# EAGLE board DXM-OOBD - V1 (EAGLE 5.11)
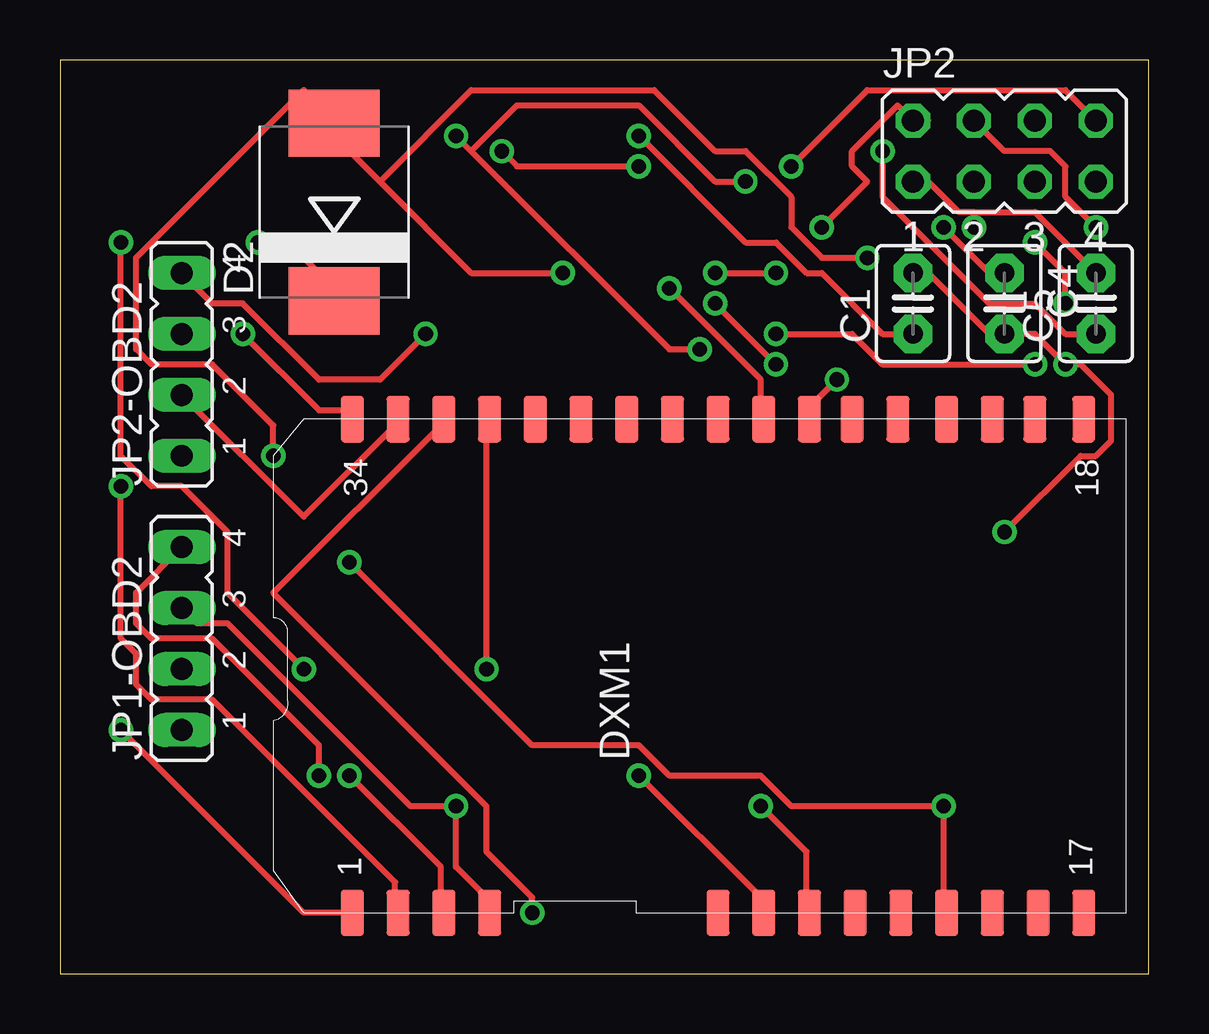
[diagram p0: board, top side]
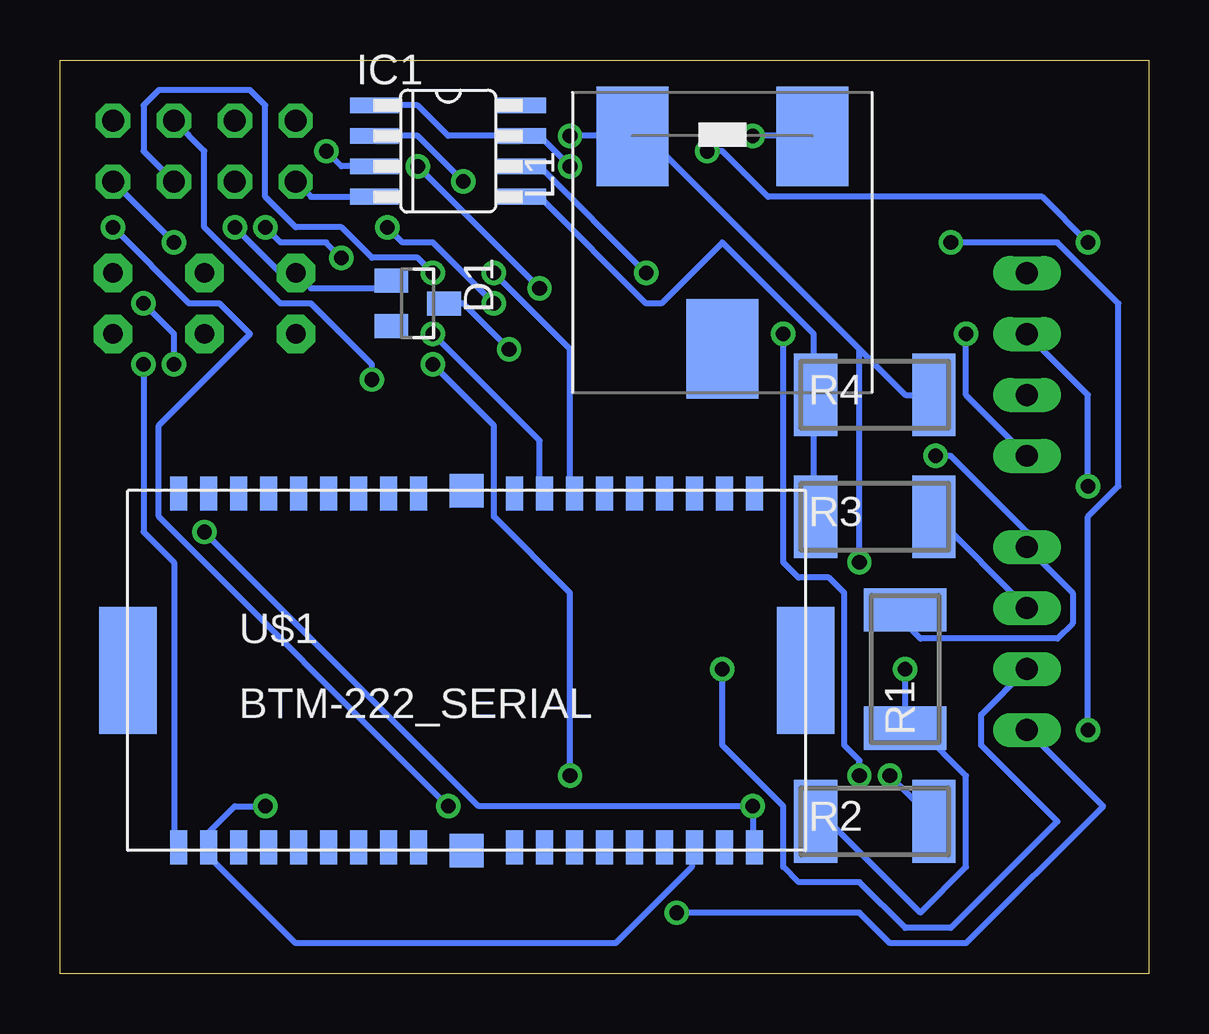
[diagram p1: board, bottom side, seen from below]

Size 45.39 x 38.09 mm. Coordinates in mm from the lower left corner, seen from the top.
Outline: 0,0 45.39,0 45.39,38.09 0,38.09 0,0
Copper layers (1*16): Top 0.035mm / dielectric 1.5mm / Bottom 0.035mm
Design rules "default": minimum track width 10mil, minimum drill 24mil, track to track 8mil, track to pad 8mil, pad to pad 8mil, via to via 8mil, smd to smd 8mil, copper to edge 40mil, drill to drill 8mil, minimum pad ring 10mil, minimum via ring 8mil, stop-mask expansion 4mil, vias tented up to drill 0mil, thermal gap 10mil

## Footprints (pad centres in the part's own frame; a part is rotated, then mirrored left to right if it is on the bottom)
C2.5-3 = drill 0.813 pad 1.6 octagon: 1 -1.27,0; 2 1.27,0
SOT23 = smd 1 x 1.4: 1 -0.95,-1.1; 2 0.95,-1.1; 3 0,1.1
SMC = smd 2.8 x 3.8: A 3.7,0; C -3.7,0
DMX1-MINI = smd 1.93 x 0.965: 1 0,32.258; 2 0,30.353; 3 0,28.448; 4 0,26.543; 9 0,17.018; 10 0,15.113; 11 0,13.208; 12 0,11.303; 13 0,9.398; 14 0,7.493; 15 0,5.588; 16 0,3.683; 17 0,1.778; 18 20.574,1.778; 19 20.574,3.81; 20 20.574,5.588; 21 20.574,7.493; 22 20.574,9.525; 23 20.574,11.43; 24 20.574,13.208; 25 20.574,15.113; 26 20.574,17.018; 27 20.574,18.923; 28 20.574,20.828; 29 20.574,22.733; 30 20.574,24.638; 31 20.574,26.543; 32 20.574,28.448; 33 20.574,30.353; 34 20.574,32.258
SO8 = smd 0.66 x 2.032: 1 -1.905,-3.073; 2 -0.635,-3.073; 3 0.635,-3.073; 4 1.905,-3.073; 5 1.905,3.073; 6 0.635,3.073; 7 -0.635,3.073; 8 -1.905,3.073
JP4 = drill 0.914 long: 1 -3.81,0; 2 -1.27,0; 3 1.27,0; 4 3.81,0
JP4Q = drill 0.914 octagon: 1 -3.81,-1.27; 2 -3.81,1.27; 3 -1.27,-1.27; 4 -1.27,1.27; 5 1.27,-1.27; 6 1.27,1.27; 7 3.81,-1.27; 8 3.81,1.27
WE-HCF_74436/38/39... = smd 4.15 x 3: 1 -4.425,3.75; 2 -4.425,-3.75; 3 4.425,0
SMS-0 = smd 1.8 x 3.45: 1 2.464,0; 2 -2.464,0
BTM-222 = smd 2.4 x 5.3: $AGND -14.625,3.75; $BGND 13.625,3.75 | smd 0.711 x 1.422: P$1 -12.5,-3.625; P$2 -11.25,-3.625; P$3 -10,-3.625; P$4 -8.75,-3.625; P$5 -7.5,-3.625; P$6 -6.25,-3.625; P$7 -5,-3.625; P$8 -3.75,-3.625; P$9 -2.5,-3.625; P$11 1.5,-3.625; P$12 2.75,-3.625; P$13 4,-3.625; P$14 5.25,-3.625; P$15 6.5,-3.625; P$16 7.75,-3.625; P$17 9,-3.625; P$18 10.25,-3.625; P$19 11.5,-3.625; P$20 11.5,11.125; P$21 10.25,11.125; P$22 9,11.125; P$23 7.75,11.125; P$24 6.5,11.125; P$25 5.25,11.125; P$26 4,11.125; P$27 2.75,11.125; P$28 1.5,11.125; P$30 -2.5,11.125; P$31 -3.75,11.125; P$32 -5,11.125; P$33 -6.25,11.125; P$34 -7.5,11.125; P$35 -8.75,11.125; P$36 -10,11.125; P$37 -11.25,11.125; P$38 -12.5,11.125 | smd 1.422 x 1.4: P$10 -0.5,-3.75; P$29 -0.5,11.25

## Placement (x,y rotation side)
C1  1µF  [C2.5-3]  35.56,27.94 90 top
C4  [C2.5-3]  39.37,27.94 270 top
C5  [C2.5-3]  43.18,27.94 90 top
D1  BAS40  [SOT23]  30.48,27.94 270 bottom
D2  [SMC]  11.43,31.75 90 top
DXM1  [DMX1-MINI]  44.45,2.54 90 top
IC1  MC34063-SO  [SO8]  29.21,34.29 270 bottom
JP1-OBD2  [JP4]  5.08,13.97 90 top
JP2  [JP4Q]  39.37,34.29 0 top
JP2-OBD2  [JP4]  5.08,25.4 90 top
L1  [WE-HCF_74436/38/39...]  17.78,30.48 270 bottom
R1  [SMS-0]  10.16,12.7 90 bottom
R2  [SMS-0]  11.43,6.35 0 bottom
R3  [SMS-0]  11.43,19.05 0 bottom
R4  [SMS-0]  11.43,24.13 0 bottom
U$1  BTM-222_SERIAL  [BTM-222]  27.94,8.89 0 bottom

## Library data of the parts
C1 C4 C5 = capacitor-wima
D1 D2 = diode
DXM1 = DXM
IC1 = mc34063
JP1-OBD2 JP2 JP2-OBD2 = jumper
L1 = wuerth-elektronik
R1-R4 = resistor-shunt; OC_FARNELL: unknown; OC_NEWARK: unknown
U$1 = BTM_222

## Nets
3V3OUT: DXM1.9
+3V3: C1.1 DXM1.14 L1.2 R4.1 U$1.P$2 U$1.P$17
+12V: C4.1 D2.A IC1.6 JP1-OBD2.4 R1.1 R2.1
ANTENNE: U$1.P$37
CAN-H: DXM1.32 JP1-OBD2.1
CAN-L: DXM1.31 JP1-OBD2.2
GND: C1.2 C4.2 C5.2 D1.1 DXM1.4 IC1.4 JP1-OBD2.3 JP2.1 R3.1 U$1.P$1 U$1.P$19
K-LINE: DXM1.33 JP2-OBD2.2
L-LINE: DXM1.34 JP2-OBD2.1
MODE1: DXM1.29
MODE2: DXM1.28
N$1: IC1.5 R3.2 R4.2
N$2: C5.1 IC1.3
N$3: D1.3 IC1.2 L1.1
N$4: D2.C DXM1.1
N$5: IC1.1 IC1.7 R1.2 R2.2
N$6: U$1.P$29
N$7: U$1.P$38
N$8: U$1.P$18
N$9: U$1.P$10
N$10: DXM1.25 JP2.8
N$12: DXM1.24 JP2.6
N$13: JP2.5 U$1.P$26
N$14: JP2.7 U$1.P$27
N$16: DXM1.10 JP2.2
N$17: DXM1.11 JP2.4
PWM+: DXM1.2 JP2-OBD2.3
PWM-: DXM1.3 JP2-OBD2.4

## Tracks (layer width: path | path; a pad name or v marks a point on that pad's centre or on a via)
+3V3  (via drill 0.61)
  Top 0.254: DXM1.14 36.83,2.54 v36.83,6.99 30.48,6.99 29.21,8.26 25.4,8.26 24.13,9.53 19.69,9.53 v12.07,17.15 | C1.1 34.29,26.67 31.75,29.21 31.12,29.21 29.84,30.48 28.58,30.48 v24.13,34.92
  Bottom 0.254: U$1.P$17 19.05,5.08 19.05,4.45 22.23,1.27 35.56,1.27 39.37,5.08 U$1.P$2 39.37,5.72 38.1,6.99 v36.83,6.99 | v24.13,34.92 21.59,34.92 L1.2 20.95,34.92 12.07,26.03 | 12.07,26.03 10.16,24.13 R4.1 | v12.07,17.15 12.07,26.03
+12V  (via drill 0.61)
  Top 0.254: v10.79,8.26 10.79,9.53 6.35,13.97 3.81,13.97 3.17,14.61 3.17,15.88 JP1-OBD2.4 | v20.95,29.21 17.14,29.21 13.34,33.02 | 13.34,33.02 11.43,34.92 D2.A 11.43,35.56 10.16,36.83 3.17,29.84 3.17,26.03 3.81,25.4 6.35,25.4 8.89,22.86 v8.89,21.59 | C4.1 38.73,29.21 v36.83,31.12 | v33.66,29.84 31.75,29.84 30.48,31.12 30.48,32.39 28.58,34.29 27.3,34.29 24.77,36.83 17.14,36.83 13.34,33.02
  Bottom 0.254: R1.1 10.16,14.61 9.53,13.97 3.81,13.97 3.17,14.61 3.17,15.88 JP1-OBD2.4 5.08,18.42 8.25,21.59 v8.89,21.59 | v10.79,8.26 9.53,6.99 9.53,6.35 R2.1 | v20.95,29.21 25.4,33.66 IC1.6 | v36.83,31.12 36.2,30.48 34.29,30.48 v33.66,29.84
CAN-H  (via drill 0.61)
  Top 0.254: v19.69,2.54 19.69,3.18 17.78,5.08 17.78,6.99 8.89,15.88 15.88,22.86 DXM1.32
  Bottom 0.254: v19.69,2.54 12.07,2.54 10.79,1.27 7.62,1.27 1.91,6.99 JP1-OBD2.1
CAN-L  (via drill 0.61)
  Top 0.254: v17.78,12.7 17.78,22.86 DXM1.31
  Bottom 0.254: v17.78,12.7 17.78,9.53 15.24,6.99 15.24,4.45 14.61,3.81 12.07,3.81 10.16,1.91 8.25,1.91 3.81,6.35 6.99,9.53 6.99,10.8 JP1-OBD2.2
GND  (via drill 0.61)
  Top 0.254: DXM1.4 17.78,2.54 17.78,3.18 16.51,4.45 v16.51,6.99 14.61,6.99 6.99,14.61 5.71,14.61 JP1-OBD2.3 | C5.2 40.64,31.75 38.1,31.75 | 38.1,31.75 37.46,31.75 36.2,33.02 JP2.1 | C1.2 36.2,29.21 38.73,26.67 C4.2 40.64,26.67 v41.91,25.4 42.55,25.4 43.81,24.13 43.81,22.23 43.18,21.59 42.55,21.59 v39.37,18.42 | v38.1,31.12 38.1,31.75
  Bottom 0.254: 31.12,28.58 D1.1 31.75,28.58 34.92,28.58 C1.2 36.2,29.21 v38.1,31.12 | U$1.P$19 16.51,5.72 v16.51,6.99 27.94,6.99 v39.37,18.42 | JP1-OBD2.3 8.89,19.05 R3.1 | JP2.1 34.92,32.39 IC1.4 | v41.91,25.4 41.91,18.42 40.64,17.15 40.64,5.72 U$1.P$1
K-LINE
  Top 0.254: JP2-OBD2.2 10.16,19.05 13.97,22.86 DXM1.33
L-LINE  (via drill 0.61)
  Top 0.254: v7.62,26.67 10.79,23.5 12.07,23.5 DXM1.34
  Bottom 0.254: v7.62,26.67 7.62,24.13 JP2-OBD2.1
N$1
  Bottom 0.254: 13.97,24.13 13.97,26.67 17.78,30.48 20.32,27.94 20.95,27.94 25.4,32.39 IC1.5 | 13.97,24.13 13.97,19.05 R3.2 | 13.97,24.13 R4.2
N$2  (via drill 0.61)
  Top 0.254: v34.29,34.29 34.29,32.39 38.73,27.94 40.64,27.94 41.91,26.67 C5.1
  Bottom 0.254: v34.29,34.29 33.66,33.66 IC1.3
N$3  (via drill 0.61)
  Top 0.254: v26.67,26.03 25.4,26.03 17.14,34.29 | v16.51,34.92 17.14,34.29 | v28.58,33.02 27.3,33.02 24.13,36.2 19.05,36.2 17.14,34.29
  Bottom 0.254: v26.67,26.03 28.58,27.94 D1.3 | v16.51,34.92 14.61,34.92 L1.1 | v28.58,33.02 30.48,34.92 IC1.2
N$4  (via drill 0.61)
  Top 0.254: v2.54,10.16 10.16,2.54 DXM1.1 | v8.25,30.48 9.53,30.48 11.43,28.58 D2.C
  Bottom 0.254: v2.54,10.16 2.54,19.05 1.27,20.32 1.27,27.94 3.81,30.48 v8.25,30.48
N$5  (via drill 0.61)
  Top 0.254: v24.13,33.66 19.05,33.66 v18.41,34.29 | v2.54,30.48 2.54,21.59 3.81,20.32 5.08,20.32 6.99,18.42 6.99,15.88 v10.16,12.7
  Bottom 0.254: IC1.1 30.48,36.2 29.21,34.92 IC1.7 25.4,34.92 v24.13,33.66 | R2.2 13.34,6.35 9.53,2.54 7.62,4.45 7.62,8.26 9.53,10.16 10.16,10.16 R1.2 v10.16,12.7 | v18.41,34.29 17.78,34.29 15.88,32.39 4.45,32.39 v2.54,30.48
N$10  (via drill 0.61)
  Top 0.254: v25.4,28.58 29.21,24.77 29.21,23.5 DXM1.25 | v30.48,33.66 33.66,36.83 41.91,36.83 JP2.8
  Bottom 0.254: v25.4,28.58 v30.48,33.66
N$12  (via drill 0.61)
  Top 0.254: v32.38,24.77 31.12,23.5 DXM1.24
  Bottom 0.254: v32.38,24.77 32.38,25.4 34.92,27.94 36.2,27.94 39.37,31.12 39.37,34.29 JP2.6
N$13  (via drill 0.61)
  Top 0.254: v27.3,29.21 v29.84,29.21
  Bottom 0.254: v27.3,29.21 24.13,26.03 24.13,20.32 U$1.P$26 | v29.84,29.21 30.48,29.84 32.38,29.84 33.66,31.12 35.56,31.12 36.83,32.39 36.83,36.2 37.46,36.83 41.27,36.83 41.91,36.2 41.91,34.29 JP2.5
N$14  (via drill 0.61)
  Top 0.254: v29.84,26.67 33.02,26.67 34.29,25.4 v40.64,25.4 | v41.91,27.94 41.91,29.21 v40.64,30.48
  Bottom 0.254: v29.84,26.67 25.4,22.23 25.4,20.32 U$1.P$27 | v40.64,25.4 40.64,26.67 v41.91,27.94 | v40.64,30.48 JP2.7
N$16  (via drill 0.61)
  Top 0.254: 36.2,35.56 JP2.2 34.92,36.2 33.02,34.29 33.02,33.66 33.66,33.02 v31.75,31.12 | v24.13,8.26 29.21,3.18 29.21,2.54 DXM1.10 | v29.84,25.4 v27.3,27.94
  Bottom 0.254: v24.13,8.26 24.13,15.88 27.3,19.05 27.3,22.86 v29.84,25.4 | v27.3,27.94 29.84,30.48 31.12,30.48 v31.75,31.12
N$17  (via drill 0.61)
  Top 0.254: v29.21,6.99 31.12,5.08 31.12,2.54 DXM1.11 | v43.18,31.12 41.91,32.39 41.91,33.66 41.27,34.29 39.37,34.29 JP2.4
  Bottom 0.254: v29.21,6.99 41.27,19.05 41.27,22.86 37.46,26.67 38.73,27.94 40,27.94 v43.18,31.12
PWM+  (via drill 0.61)
  Top 0.254: v2.54,20.32 2.54,13.97 3.17,13.34 3.17,12.07 3.81,11.43 6.35,11.43 13.97,3.81 13.97,2.54 DXM1.2
  Bottom 0.254: v2.54,20.32 2.54,24.13 JP2-OBD2.3
PWM-  (via drill 0.61)
  Top 0.254: v12.07,8.26 15.88,4.45 15.88,2.54 DXM1.3 | v15.24,26.67 13.34,24.77 10.79,24.77 7.62,27.94 6.35,27.94 JP2-OBD2.4
  Bottom 0.254: v12.07,8.26 12.07,8.89 12.7,9.53 12.7,15.88 13.34,16.51 14.61,16.51 15.24,17.15 v15.24,26.67